# Altium PCB Controller.PcbDoc
Units mm, origin at the board's own origin, x right, y up, seen from the top; angles counter-clockwise.
Board outline 43 x 32 mm, 4 copper layers (Top Layer, GND, POWER, Bottom Layer), stack 0.603 mm thick; 51 components, 47 nets, 257 pads, 153 vias.
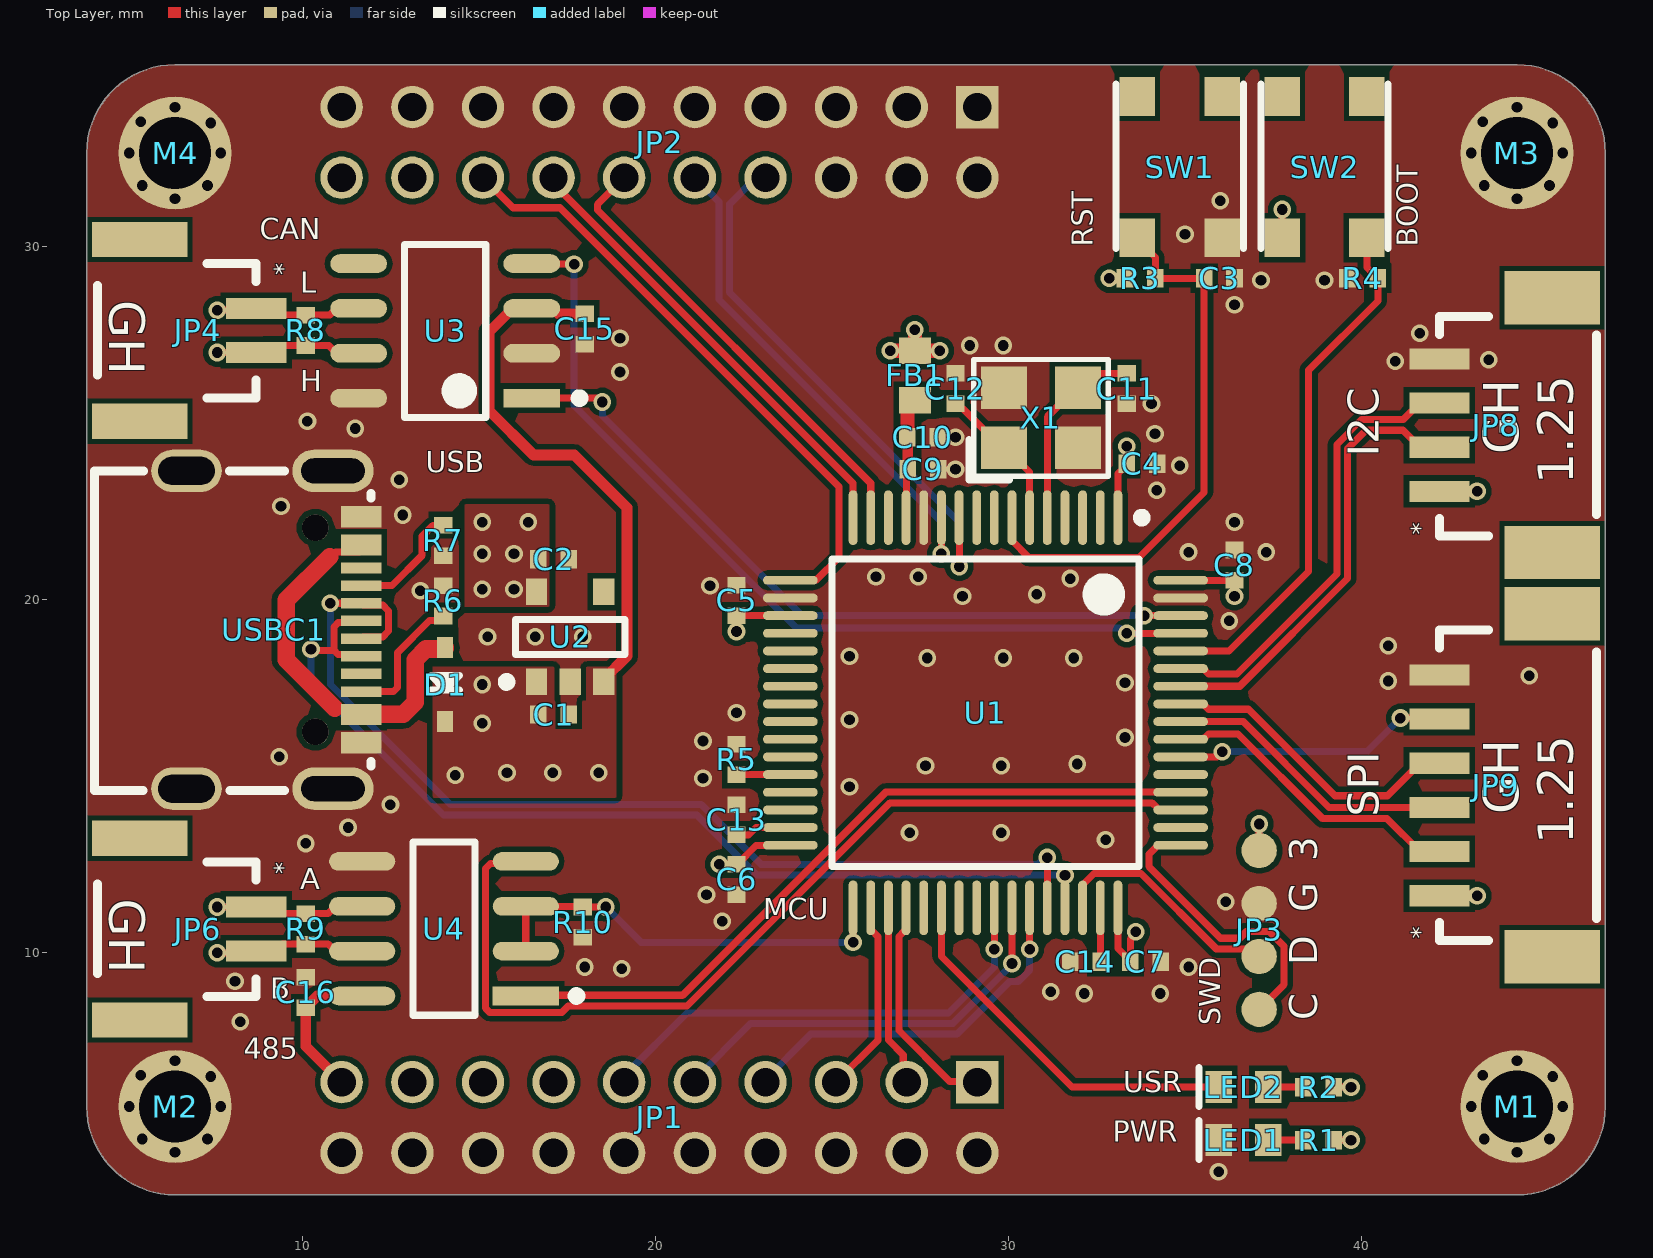
[diagram p0: Top Layer view]
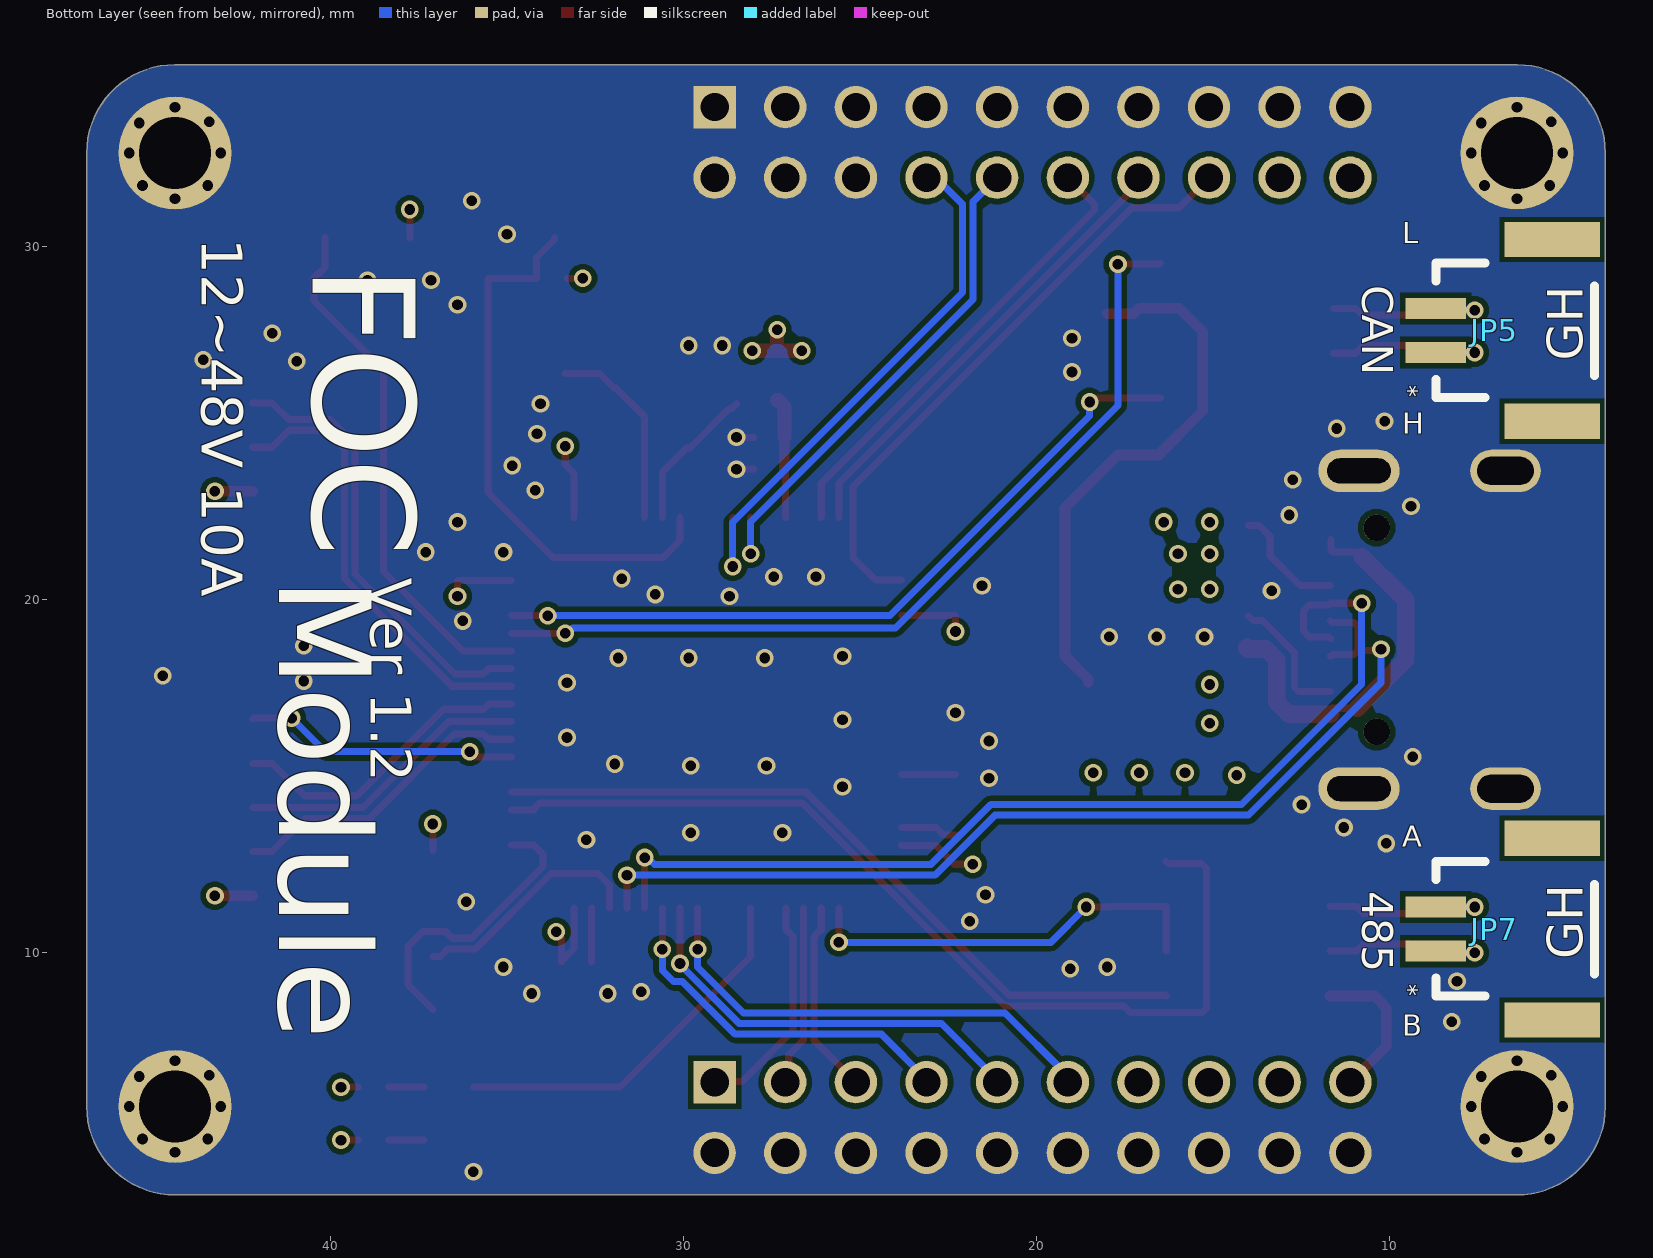
[diagram p1: Bottom Layer view, seen from below]
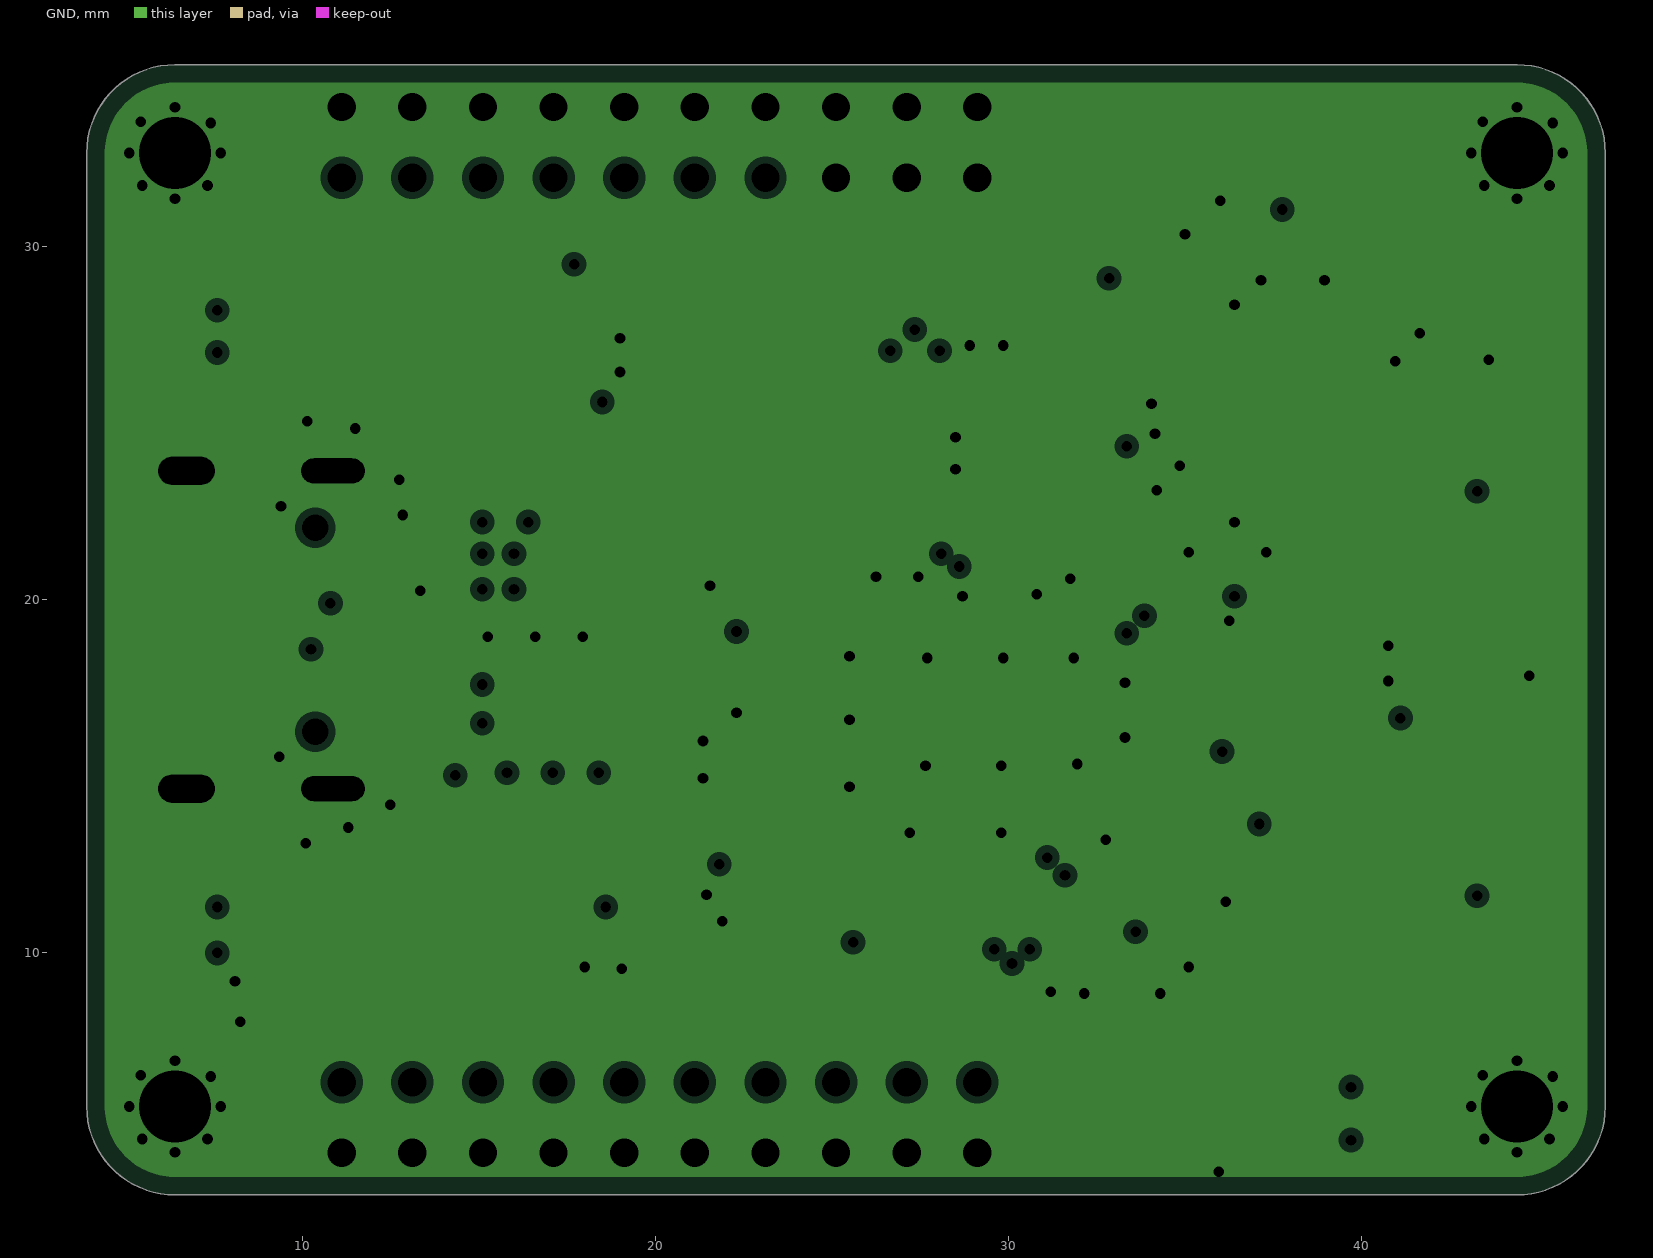
[diagram p2: GND, clearances drawn from the general rule]
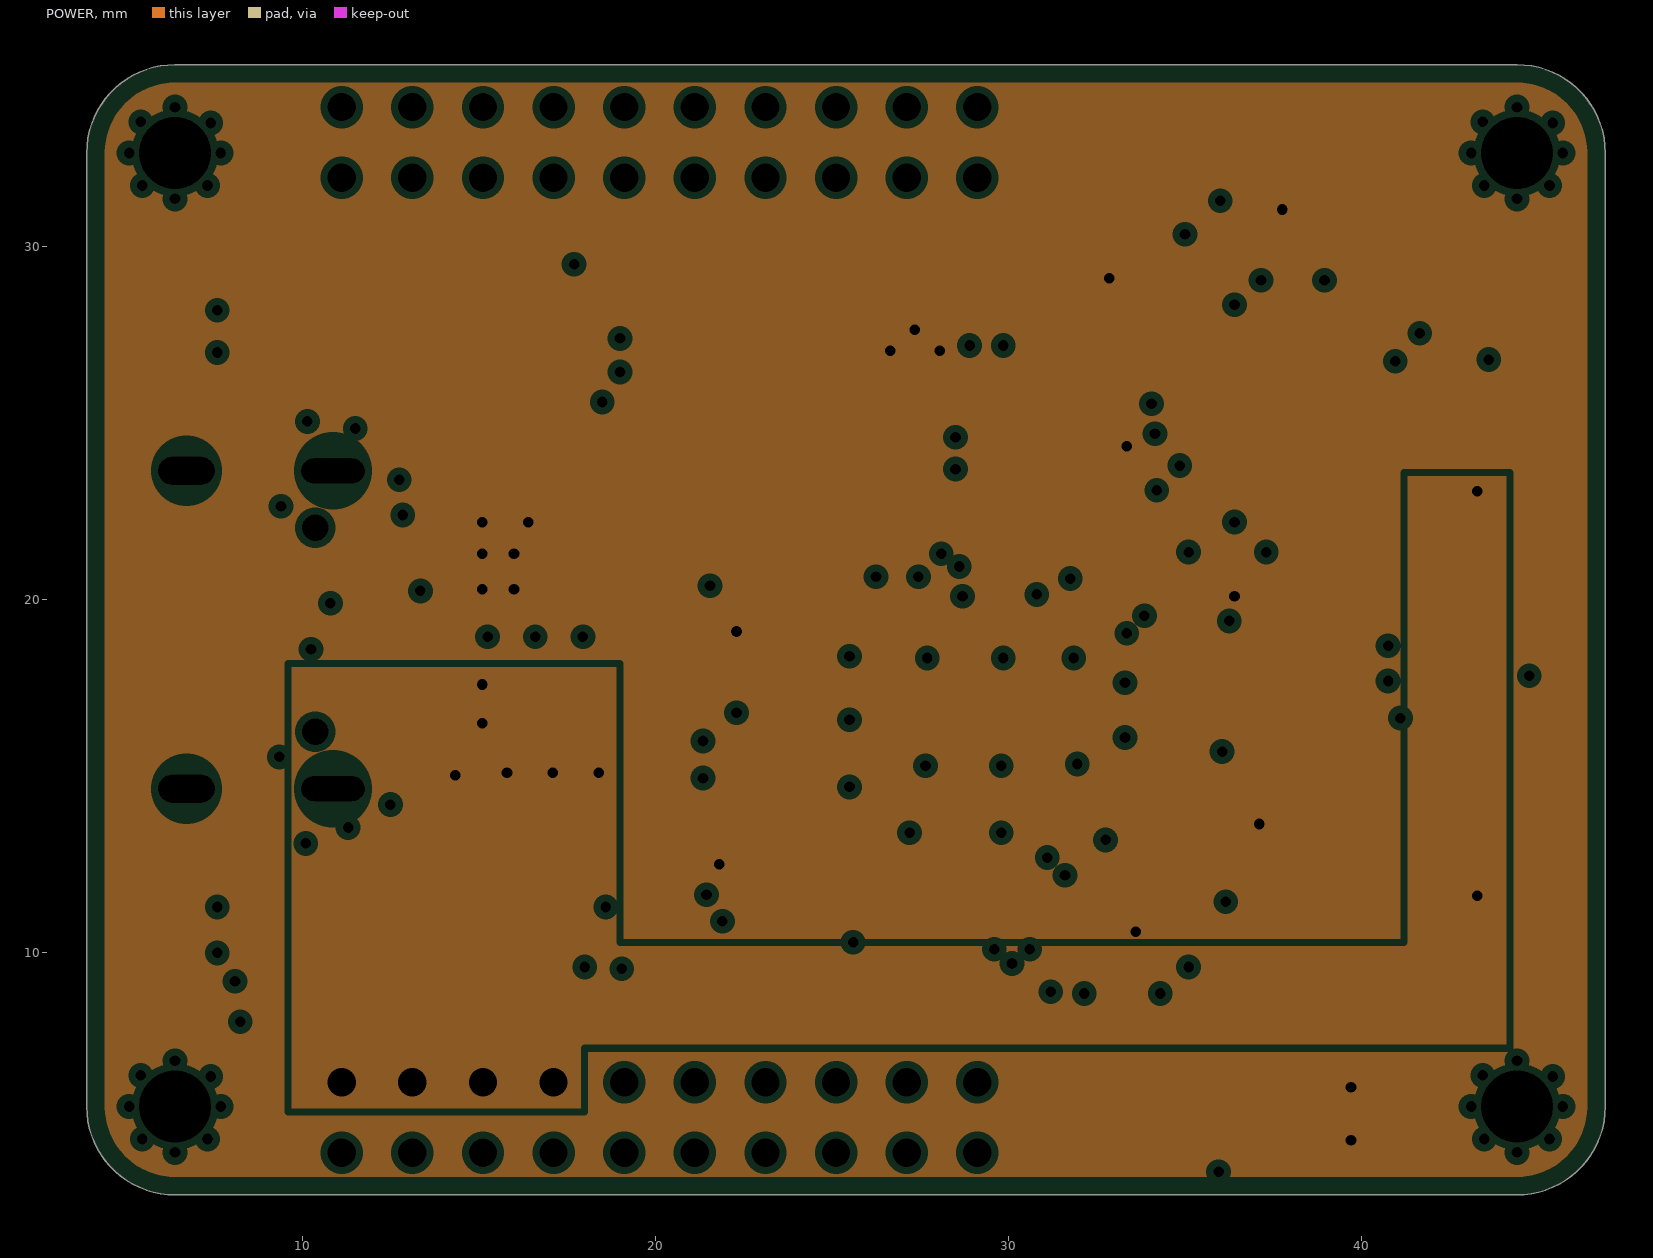
[diagram p3: POWER, clearances drawn from the general rule]
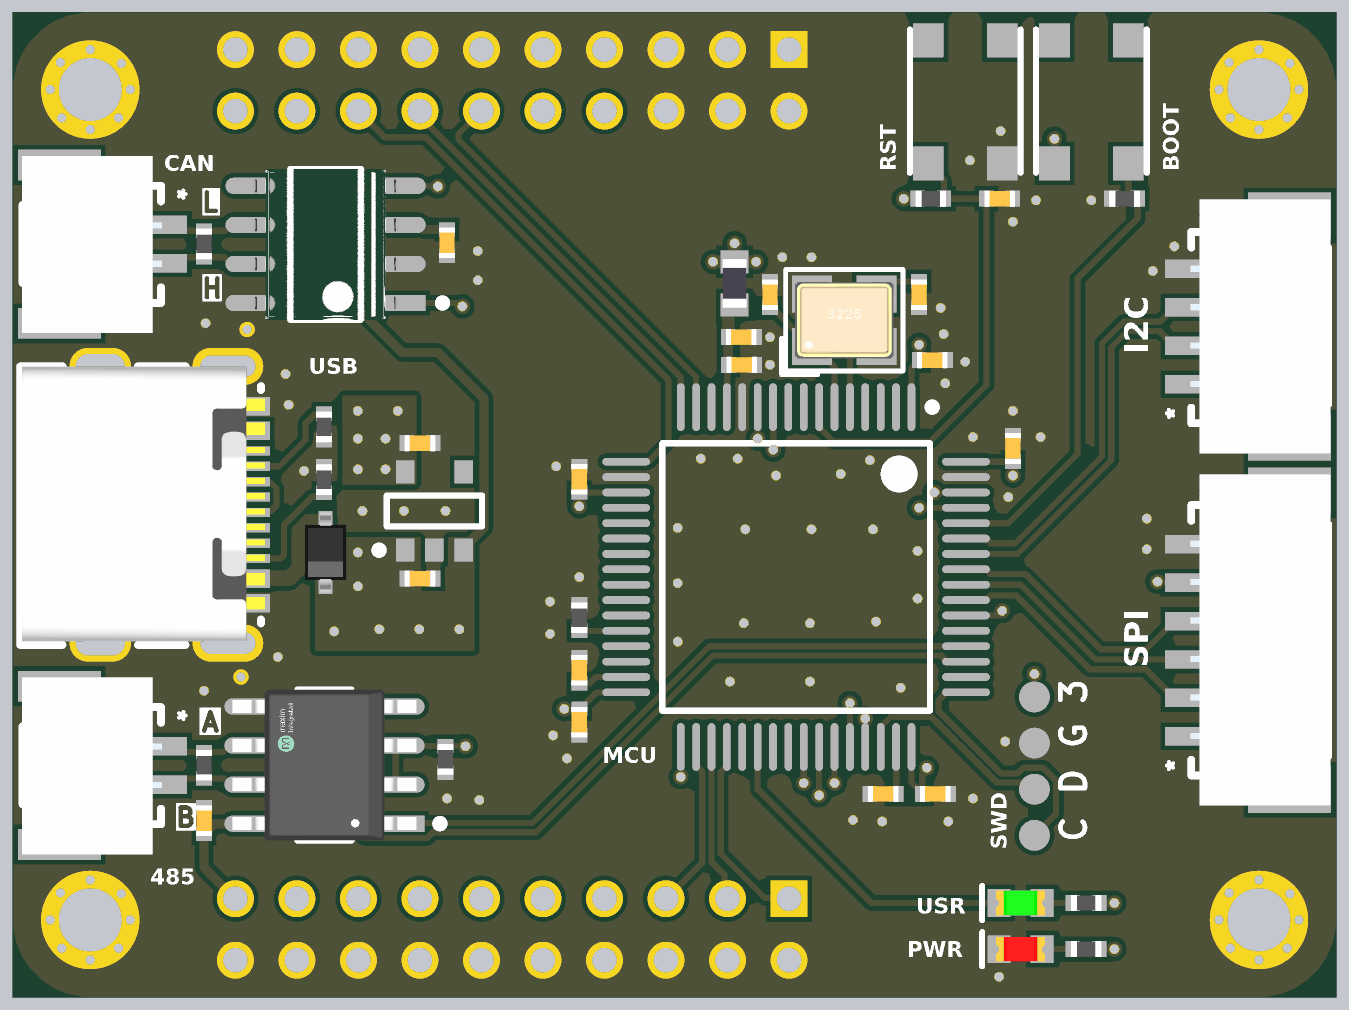
[diagram p4: 3D render of the assembled board from above, using the file's embedded part models]

## Layer stack, top to bottom
Top Solder: solder mask 0.0102, Solder Resist, Dk 3.5
Top Layer: signal copper 0.0356
Dielectric 2: prepreg 0.0711, PP-006, Dk 4.1
GND: plane copper 0.035, net PGND
Dielectric 1: dielectric 0.32, FR-4, Dk 4.8
POWER: plane copper 0.035, net 3V3
Dielectric 3: prepreg 0.0711, PP-006, Dk 4.1
Bottom Layer: signal copper 0.0356
Bottom Solder: solder mask 0.0102, Solder Resist, Dk 3.5

## Board outline
3.9,5.65 ccw(c6.4,5.65) 6.4,3.15 44.4,3.15 ccw(c44.4,5.65) 46.9,5.65 46.9,32.65 ccw(c44.4,32.65) 44.4,35.15 6.4,35.15 ccw(c6.4,32.65) 3.9,32.65 3.9,32.66

## Design rules (kind name [scope] priority, off if disabled: settings)
Clearance [All] p1: gap=0.1 ignorepadtopadclearanceinfootprint=FALSE except(0.15: Arc-Fill Arc-Poly Arc-Region Track-Fill Track-Poly Track-Region SMDPad-Fill SMDPad-Poly SMDPad-Region THPad-Fill THPad-Poly THPad-Region Via-Fill Via-Poly Via-Region Fill-Fill Fill-Poly Fill-Region Poly-Poly Poly-Region Region-Region)
DiffPairsRouting [All] p1: maxlimit=0.5 minlimit=0.1 mostfreqgap=0.254 toplayer_minwidth=0.1 toplayer_maxwidth=0.5 toplayer_prefwidth=0.254 bottomlayer_minwidth=0.1 bottomlayer_maxwidth=0.5 bottomlayer_prefwidth=0.254 maxuncoupledlength=12.7
HoleSize [All] p1: absolutevalues=TRUE maxlimit=6.3 minlimit=0.3 maxpercent=80.000 minpercent=20.000
HoleToHoleClearance [All] p1: gap=0.1 allowstackedmicrovias=TRUE
MinimumSolderMaskSliver [All] p1: minsoldermaskwidth=0.13
PlaneClearance [All] p1: clearance=0.2
PlaneConnect [All] p1: planeconnectstyle=Direct reliefexpansion=0.508 reliefentries=4 reliefconductorwidth=0.254 reliefairgap=0.254
PolygonConnect [All] p1: connectstyle=Direct reliefconductorwidth=0.254 reliefentries=4 polygonreliefangle="90 Angle" airgapwidth=0.254
RoutingVias [All] p1: holewidth=0.3 width=0.5 viastyle="Through Hole" minholewidth=0.2 minwidth=0.4 maxholewidth=5 maxwidth=10
SilkToSilkClearance [All] p1: silktosilkclearance=0
SilkToSolderMaskClearance [IsPad] p1: minsilkscreentomaskgap=0 clearancetoexposedcopper=TRUE
SolderMaskExpansion [All] p1: expansion=0 istentingtop=FALSE
UnRoutedNet [All] p1: checkbadconnections=TRUE
Width [All] p1: maxlimit=10 minlimit=0.1 preferedwidth=0.2
21 further rules are at their usual default settings.

## Components (designator, comment, footprint, x,y, rotation, side; value= is the part's Value field where it differs from the comment)
C1 "1uF" Capacitor_0402_SMD 17.55,16.75 r180 top
C2 "1uF" Capacitor_0402_SMD 17.55,21.15 r180 top
C3 "100nF" Capacitor_0402_SMD 35.54,29.1 r0 top
C4 "100nF" Capacitor_0402_SMD 34.21,23.85 r180 top
C5 "100nF" Capacitor_0402_SMD 22.3,20.41 r270 top
C6 "100nF" Capacitor_0402_SMD 22.3,11.65 r90 top
C7 "100nF" Capacitor_0402_SMD 34.31,9.75 r180 top
C8 "100nF" Capacitor_0402_SMD 36.4,21.41 r270 top
C9 "1uF" Capacitor_0402_SMD 28.01,23.7 r180 top
C10 "100nF" Capacitor_0402_SMD 28,24.6 r180 top
C11 "22pF" Capacitor_0402_SMD 33.35,25.55 r90 top
C12 "22pF" Capacitor_0402_SMD 28.5,26.41 r270 top
C13 "2.2uF" Capacitor_0402_SMD 22.3,14.2 r270 top
C14 "2.2uF" Capacitor_0402_SMD 31.75,9.75 r0 top
C15 "100nF" Capacitor_0402_SMD 18,28.1 r270 top
C16 "100nF" Capacitor_0402_SMD 10.1,8.45 r90 top
D1 "B5819WS" SOD323 14.05,18.65 r270 top
FB1 "FerriteBead" FerriteBead_0603_SMD 27.35,27.05 r270 top value=220R@100MHz
JP1 "Header 2X10" HDR2.0-LI-2x10P 29.12,6.34 r180 top
JP2 "Header 2X10" HDR2.0-LI-2x10P 29.12,33.95 r180 top
JP3 "SWD interface" SWD_INTERFACE 37.1,8.4 r90 top
JP4 "GH1.25-2Pin" A1257WR-S-XP-2PIN 8.7,28.25 r270 top
JP5 "GH1.25-2Pin" A1257WR-S-XP-2PIN 8.7,27 r90 bottom
JP6 "GH1.25-2Pin" A1257WR-S-XP-2PIN 8.7,11.3 r270 top
JP7 "GH1.25-2Pin" A1257WR-S-XP-2PIN 8.7,10.05 r90 bottom
JP8 "GH1.25-4Pin" A1257WR-S-XP-4Pin 42.2,23.069 r90 top
JP9 "GH1.25-6Pin" A1257WR-S-XP-6Pin 42.2,11.619 r90 top
LED1 "红色" LED_0603_SMD_RED 37.35,4.7 r180 top
LED2 "绿色" LED_0603_SMD_GREEN 37.35,6.2 r180 top
M1 "M2 Hole" "M2 HOLE" 44.4,5.65 r0 top
M2 "M2 Hole" "M2 HOLE" 6.4,5.65 r0 top
M3 "M2 Hole" "M2 HOLE" 44.4,32.65 r0 top
M4 "M2 Hole" "M2 HOLE" 6.4,32.65 r0 top
R1 "1K" Resistor_0402_SMD 38.35,4.7 r0 top
R2 "1K" Resistor_0402_SMD 38.35,6.2 r0 top
R3 "10K" Resistor_0402_SMD 33.3,29.1 r0 top
R4 "10K" Resistor_0402_SMD 40.46,29.1 r180 top
R5 "10K" Resistor_0402_SMD 22.3,15.05 r90 top
R6 "5.1K" Resistor_0402_SMD 14,20.4 r270 top
R7 "5.1K" Resistor_0402_SMD 14,22.11 r270 top
R8 "120R" Resistor_0402_SMD 10.1,27.2 r90 top
R9 "120R" Resistor_0402_SMD 10.1,11.11 r270 top
R10 "10K" Resistor_0402_SMD 17.95,11.3 r270 top
SW1 "SW4_3x4x2.5" SW4_3x4x2.5 36.05,34.25 r270 top
SW2 "SW4_3x4x2.5" SW4_3x4x2.5 40.15,34.25 r270 top
U1 "STM32F405RGT6" STM-LQFP64_L 29.35,16.8 r270 top
U2 "ME6211CXX" ME6211CXX 17.589,18.947 r90 top
U3 "TJA1050T/CM,118" FP-SOT96-1-IPC_C 14.051,27.615 r180 top
U4 "MAX485ESA+T" FP-S8-2-IPC_C 14.016,10.685 r180 top
USBC1 "TYPE-C 2.0 -16P" USB-C-SMD_16P 9.2,19.15 r90 top
X1 "8MHz" "OSC 3225-4P" 30.92,25.15 r0 top

## Footprints (in the part's own frame and the unit in brackets; to place one, negate y for a bottom-side part, rotate by r counter-clockwise, add the part's x,y. Pads: shape width x height; smd on the part's side, far side on the other; paste and mask are expansions set on the pad)
A1257WR-S-XP-2PIN [mm]
  rect 0.6x1.7 smd paste+0 mask+0: 1(0,0) 2(1.25,0)
  rect 1x2.7 smd paste+0 mask+0: 3(-1.95,-3.3) 3(3.2,-3.3)
  silkscreen extent -1.27,-4.5 2.54,0, body extent -2.24,-4.52 3.52,0.03, height 4.13
A1257WR-S-XP-4Pin [mm]
  rect 1.508x2.7 smd paste+0 mask+0: 0(-1.731,-3.2) 0(5.481,-3.2)
  rect 0.6x1.7 smd paste+0 mask+0: 1(0,0) 2(1.25,0) 3(2.5,0) 4(3.75,0)
  silkscreen extent -1.27,-4.45 4.95,0, body extent -2.25,-4.52 6.01,0.03, height 4.13
A1257WR-S-XP-6Pin [mm]
  rect 1.508x2.7 smd paste+0 mask+0: 0(-1.731,-3.2) 0(7.981,-3.2)
  rect 0.6x1.7 smd paste+0 mask+0: 1(0,0) 2(1.25,0) 3(2.5,0) 4(3.75,0) 5(5,0) 6(6.25,0)
  silkscreen extent -1.27,-4.45 7.52,0, body extent -2.24,-4.52 8.52,0.03, height 4.13
Capacitor_0402_SMD [mm]
  rect 0.47x0.52 smd: 1(0,0) 2(0.86,0)
  body extent -0.17,-0.26 1.02,0.26, height 0.51
FerriteBead_0603_SMD [mm]
  rect 0.75x0.9 smd: 1(0,0) 2(1.4,0)
  body extent -0.1,-0.4 1.5,0.4, height 0.8
FP-S8-2-IPC_C [mm]
  rect 1.874x0.527 smd paste+0 mask+0: 1(-2.316,1.905)
  rrect100% 1.874x0.527 smd paste+0 mask+0: 2(-2.316,0.635) 3(-2.316,-0.635) 4(-2.316,-1.905) 5(2.316,-1.905) 6(2.316,-0.635) 7(2.316,0.635) 8(2.316,1.905)
  silkscreen extent -3.88,-2.45 0.88,2.45, body extent -3.35,-2.55 3.35,2.55, height 0.25
FP-SOT96-1-IPC_C [mm]
  rect 1.604x0.528 smd paste+0 mask+0: 1(-2.451,1.905)
  rrect100% 1.604x0.528 smd paste+0 mask+0: 2(-2.451,0.635) 3(-2.451,-0.635) 4(-2.451,-1.905) 5(2.451,-1.905) 6(2.451,-0.635) 7(2.451,0.635) 8(2.451,1.905)
  silkscreen extent -3.93,-2.45 1.15,2.45, body extent -3.35,-2.55 3.35,2.55, height 0.25
HDR2.0-LI-2x10P [mm]
  rect 1.2x1.2 hole 0.8: 1(0,0)
  round 1.2 hole 0.8: 2(0,2) 3(2,0) 4(2,2) 5(4,0) 6(4,2) 7(6,0) 8(6,2) 9(8,0) 10(8,2) 11(10,0) 12(10,2) 13(12,0) 14(12,2) 15(14,0) 16(14,2) 17(16,0) 18(16,2) 19(18,0) 20(18,2)
  body extent -1,-1 19,3, height 6
LED_0603_SMD_GREEN [mm]
  rect 0.75x0.9 smd: 1(0,0) 2(1.4,0)
  silkscreen extent 1.95,-0.55 1.95,0.55, body extent -0.1,-0.4 1.5,0.4, height 0.8
LED_0603_SMD_RED [mm]
  rect 0.75x0.9 smd: 1(0,0) 2(1.4,0)
  silkscreen extent 1.95,-0.55 1.95,0.55, body extent -0.1,-0.4 1.5,0.4, height 0.8
"M2 HOLE" [mm]
  round 3.2 hole 2.05: 1(0,0)
ME6211CXX [mm] "SOT23, 5-Leads, Body 2.90x2.80mm, Pitch 0.95mm, IPC High Density"
  rect 0.75x0.6 smd: 1(-1.275,0.95) 2(-1.275,0) 3(-1.275,-0.95) 4(1.275,-0.95) 5(1.275,0.95)
  silkscreen extent -1.4,-1.55 0.5,1.92, body extent -0.9,-1.55 0.9,1.55, height 1.3
"OSC 3225-4P" [mm] "3.2*2.5*0.7mm(长宽高)"
  rect 1.3x1.2 smd: 1(-1.05,-0.85) 2(1.05,-0.85) 3(1.05,0.85) 4(-1.05,0.85)
  silkscreen extent -2.03,-1.75 1.91,1.65, body extent -1.6,-1.25 1.6,1.25, height 0.7
Resistor_0402_SMD [mm]
  rect 0.47x0.52 smd: 1(0,0) 2(0.86,0)
  body extent -0.07,-0.26 0.93,0.26, height 0.36
SOD323 [mm]
  rect 0.59x0.45 smd: 1(0,0) 2(2.1,0)
  silkscreen extent 0.8,-0.4 1.2,0.4, body extent -0.25,-0.67 2.35,0.67, height 1.1
STM-LQFP64_L [mm] "Thin QFP, 64-Leads, Body 10x10mm, Pitch 0.5mm, IPC High Density"
  oval 1.55x0.25 smd: 1(-5.525,3.75) 2(-5.525,3.25) 3(-5.525,2.75) 4(-5.525,2.25) 5(-5.525,1.75) 6(-5.525,1.25) 7(-5.525,0.75) 8(-5.525,0.25) 9(-5.525,-0.25) 10(-5.525,-0.75) 11(-5.525,-1.25) 12(-5.525,-1.75) 13(-5.525,-2.25) 14(-5.525,-2.75) 15(-5.525,-3.25) 16(-5.525,-3.75) 33(5.525,-3.75) 34(5.525,-3.25) 35(5.525,-2.75) 36(5.525,-2.25) 37(5.525,-1.75) 38(5.525,-1.25) 39(5.525,-0.75) 40(5.525,-0.25) 41(5.525,0.25) 42(5.525,0.75) 43(5.525,1.25) 44(5.525,1.75) 45(5.525,2.25) 46(5.525,2.75) 47(5.525,3.25) 48(5.525,3.75)
  oval 0.25x1.55 smd: 17(-3.75,-5.525) 18(-3.25,-5.525) 19(-2.75,-5.525) 20(-2.25,-5.525) 21(-1.75,-5.525) 22(-1.25,-5.525) 23(-0.75,-5.525) 24(-0.25,-5.525) 25(0.25,-5.525) 26(0.75,-5.525) 27(1.25,-5.525) 28(1.75,-5.525) 29(2.25,-5.525) 30(2.75,-5.525) 31(3.25,-5.525) 32(3.75,-5.525) 49(3.75,5.525) 50(3.25,5.525) 51(2.75,5.525) 52(2.25,5.525) 53(1.75,5.525) 54(1.25,5.525) 55(0.75,5.525) 56(0.25,5.525) 57(-0.25,5.525) 58(-0.75,5.525) 59(-1.25,5.525) 60(-1.75,5.525) 61(-2.25,5.525) 62(-2.75,5.525) 63(-3.25,5.525) 64(-3.75,5.525)
  silkscreen extent -5.65,-4.35 4.35,4.55, body extent -5,-5 5,5, height 1.6
SW4_3x4x2.5 [mm]
  rect 1.1x1 smd: 1(0,0) 2(4,0) 3(0,-2.4) 4(4,-2.4)
  silkscreen extent -0.35,-3 4.3,0.6, body extent -0.36,-2.9 4.36,0.5, height 2.5
SWD_INTERFACE [mm]
  round 1 smd: 1(0,0) 2(1.5,0) 3(3,0) 4(4.5,0)
USB-C-SMD_16P [mm] "封装库来自淘宝ID:黄晶宝石"
  oval 1.2x2.3 hole 0.7 slot 1.8 at 90 deg: 0(-4.5,-1.675) 0(4.5,-1.675)
  oval 1.2x2 hole 0.8 slot 1.6 at 90 deg: 0(-4.5,2.475) 0(4.5,2.475)
  rect 0.3x1.15 smd: A1(3.35,-2.473) A4(2.55,-2.471) A5(1.25,-2.475) A6(0.25,-2.475) A7(-0.25,-2.473) A9(-2.55,-2.475) A12(-3.35,-2.475) B1(-3.05,-2.475) B4(-2.25,-2.475) B5(-1.75,-2.475) B6(-0.75,-2.475) B7(0.75,-2.473) B9(2.25,-2.471) B12(3.05,-2.473)
  rect 0.3x1.148 smd: A8(1.75,-2.475) B8(-1.25,-2.475)
  round 0.75 hole 0.75 unplated: ""(-2.89,-1.175) ""(2.89,-1.175)
  silkscreen extent -4.56,-2.75 4.5,5.08, body extent -4.44,-2.87 4.5,5.03, height 3.25

## Part data
C1 C2 C3 C4 C5 C6 C7 C8 C9 C10 C11 C12 C13 C14 C15 C16: library part C, "无极性贴片电容", BOM名称=无极性贴片电容, 学习资源=www.ooocke.com, 版权归属=源创客
D1: library part 1N5819, "肖特基二极管", BOM名称=肖特基二极管, 学习资源=www.ooocke.com, 属性=40V/2A, 版权归属=源创客
JP1 JP2: library part "Header 10X2", "10*2P接插件", BOM名称=10*2P接插件, 封装库来自淘宝卖家 ID：黄晶宝石=其他店铺购入均为盗版假冒封装库, 联系卖家，免费查找封装=唯一出售店铺网址https://shop463601444.taobao.com
JP3: library part SWD_interface
JP4 JP5 JP6 JP7 JP8 JP9: "CJTconn A1257 Series 1.25mm pitch wire to board connector"
LED1 LED2: library part LED-SMD, "贴片LED", BOM名称=贴片LED, 学习资源=www.ooocke.com, 版权归属=源创客
M1 M2 M3 M4: library part M2_hole
R1 R2 R3 R4 R5 R6 R7 R8 R9 R10: library part R, "贴片电阻", BOM名称=贴片电阻, 学习资源=www.ooocke.com, 版权归属=源创客
U1: library part CMP-0243-00019-3, "ARM Cortex-M4 32-bit MCU+FPU, 210 DMIPS, 1024 kB Flash, 192 kB Internal RAM, 51 I/Os, 64-pin LQFP, -40 to 85 degC, Tray", I/Os (High Current)=51, Manufacturer=STMicroelectronics, Operating Frequency(F) (Processor speed) (MHz)=168, Supply Voltage(Vcc) max (V)=3.6, Supply Voltage(Vcc) min (V)=1.8, ComponentLink1Description="Manufacturer URL", ComponentLink1URL=http://www.st.com/web/en/home.html, ComponentLink2Description=Datasheet, ComponentLink2URL=http://www.st.com/st-web-ui/static/active/en/resource/technical/document/datasheet/DM00037051.pdf, ComponentLink3Description="Package Specification", ComponentLink3URL=http://www.st.com/st-web-ui/static/active/en/resource/technical/document/datasheet/DM00037051.pdf, Core="ARM Cortex-M4", D/A Converter=2x12-bit, DatasheetVersion="Rev. 4", FLASH Size (Prog) (kB)=1024, Internal RAM Size (kB)=192, Mounting Technology="Surface Mount", PackageDescription="64-Pin Low Profile Quad Flat Package, 10 x 10 mm Body, 0.5 mm Pitch", PackageReference=LQFP64, PackageVersion="Rev. 4, 06/2013", Packing=Tray, PartNumber=STM32F405RGT6
U2: "高精度、高纹波抑制比、低噪声、超快响应 LDO"
U3: library part CMP-2000-04923-2, "IC TRANSCEIVER HALF 1/1 8SO", Case/Package=SO, Max Operating Temperature=150°C, Max Supply Current=10mA, Max Supply Voltage=5.25V, Min Operating Temperature=-40°C, Min Supply Voltage=4.75V, Package Quantity=2500, Contact Plating=Gold, Data Rate=1Mbps, Interface=CAN, Lead Free="Lead Free", Mount="Surface Mount", Nominal Supply Current=10mA, Number of Pins=8, Number of Receive Buffers=1, Number of Transceivers=1, Number of Transmit Buffers=1, Packaging="Tape and Reel", Radiation Hardening=No, REACH SVHC="No SVHC", Receiver Hysteresis=70mV, Simplex/Duplex="Half Duplex"
U4: library part CMP-05679-000009-1, "IC TRANSCEIVER HALF 1/1 8SOIC", Manufacturer="Maxim Integrated", Max Supply Voltage=5.25V, Min Supply Voltage=4.75V, Nominal Supply Current=0.5mA, Package=S8-2, Temperature="-40°C to +85°C", Temperature Range High=+85°C, Temperature Range Low=-40°C, Automotive=No, Category=IC, ComponentLink2Description=Datasheet, ComponentLink2URL=https://datasheets.maximintegrated.com/en/ds/MAX1487-MAX491.pdf, Data Rate=2.5Mbits/s, Device Class L1="Integrated Circuits (ICs)", Device Class L2="Interface ICs", Device Class L3="RS-232 / RS-422 / RS-485 Interface ICs", Digikey Description="IC TRANSCEIVER HALF 1/1 8SOIC", Footprint Url=https://pdfserv.maximintegrated.com/land_patterns/90-0096.PDF, Height=1.75mm, Interface=RS-485,RS-422, Ipc Land Pattern Name=SOIC127P600X155-8, Lead Free=Yes, Manufacturer Part Number=MAX485ESA+T, Mouser Description="RS-422/RS-485 Interface IC RS-485/RS-422 Transceiver", Number Of Receivers=1, Number Of Transmitters=1, Octopart=https://octopart.com/max485esa%2Bt-maxim+integrated-40011239, RoHS=TRUE, Simplex Duplex=Half-Duplex, Standoff Height=0.1mm
USBC1: library part USB2.0_Type-C_16Pin, "USB2.0_Type-C_16Pin母座", 联系卖家 免费技术支持=封装库来自淘宝卖家ID：黄晶宝石, 联系卖家 免费查找封装=唯一出售店铺网址https://shop463601444.taobao.com
X1: library part XTAL-4P, "4脚无源晶振", BOM名称=4脚无源晶振, 学习资源=www.ooocke.com, 版权归属=源创客

## Via types
v1: diameter 0.5, hole 0.3, Top Layer to Bottom Layer, tented both sides, 119 vias
v2: diameter 0.3, hole 0.3, Top Layer to Bottom Layer, 32 vias
v3: diameter 0.5, hole 0.3, Top Layer to Bottom Layer, 2 vias

## Nets (pads, with @x,y where several pads share a name; then routed paths per layer and width w, separated by ;. In a path a pad name is that pad's centre, name@x,y a point inside that pad or via, vN(x,y) a via of type N, cw(c..) or ccw(c..) an arc to the next point about the centre after c; other vN are vias at no path point)
3V3: C2.2 C4.2 C5.2 C6.2 C7.2 C8.2 FB1.1 JP3.4 R1.2 R2.2 R3.1 SW2.4 U1.1 U1.19 U1.32 U1.48 U1.64 U2.5 | length 15.9
  Top Layer w0.2: v1(21.81,12.51) C6.2 22.325,12.51 22.855,13.04 23.815,13.04 U1.32 ; v1(22.3,19.1) C5.2 U1.19 ; v1(32.85,29.1) R3.1 ; U1.48 33.1,10.125 C7.2@33.45,9.775 ; U1.1 33.1,23.575 33.35,23.825 C4.2 v1(33.35,24.35) ; C7.2 C7.2@33.45,9.775 ; v1(33.6,10.6) 33.6,10.546 33.45,10.396 C7.2@33.45,9.775 ; U1.64 C8.2 v1(36.4,20.1) ; JP3.4 v1(37.1,13.65) ; SW2.4 v1(37.75,31.05) ; R1.2 v1(39.7,4.7) ; R2.2 v1(39.7,6.2)
  Top Layer w0.4: v1(26.65,27.05) FB1.1 ; v1(27.35,27.65) FB1.1 ; v1(28.05,27.05) FB1.1
  other v1: 15.1,20.3 16,20.3 15.1,21.3 16,21.3 15.1,22.2 16.4,22.2
3V3A: C9.2 C10.2 FB1.2 U1.13 | length 3.5
  Top Layer w0.2: U1.13 27.11,22.335 27.11,23.66 C9.2
  Top Layer w0.3: C10.2 27.145,24.595 27.145,23.705 C9.2
  Top Layer w0.4: C10.2 27.14,25.475 27.315,25.65 FB1.2
5V: C1.2 C15.1 C16.1 D1.2 JP1.13 JP1.15 JP1.17 JP1.19 JP8.1 JP9.1 U2.1 U2.3 U3.3 U4.8 | length 21.9
  Top Layer w0.3: JP1.19 10.1,7.36 C16.1 10.125,8.45 10.21,8.535 10.21,8.56 10.43,8.78 U4.8 ; C15.1 17.252,28.1 17.102,28.25 U3.3 15.964,28.25 15.3,27.586 15.3,25.35 16.55,24.1 17.7,24.1 19.2,22.6 19.2,18.408 18.539,17.747 U2.3 ; JP9.1 v1(43.269,11.619) ; JP8.1 v1(43.269,23.069)
  other v1: 14.332,15.032 15.8,15.1 17.1,15.1 18.4,15.1 15.1,16.5 15.1,17.6
ADC_IA: JP2.12 U1.15 | length 13.1
  Top Layer w0.2: JP2.12 18.368,31.198 18.368,31.032 26.1,23.3 U1.15
ADC_IB: JP2.14 U1.16 | length 13.1
  Top Layer w0.2: JP2.14 17.12,31.78 25.6,23.3 U1.16
ADC_IC: JP2.16 U1.17 | length 17.3
  Top Layer w0.2: JP2.16 15.97,31.1 17.3,31.1 25.2,23.2 25.2,21.2 24.56,20.56 23.835,20.56 U1.17
ADC_TEMP: JP2.8 U1.10 | length 15.7
  Top Layer w0.2: U1.10 28.61,22.315 v1(28.61,20.94)
  Bottom Layer w0.2: JP2.8 22.85,31.95 22.1,31.2 22.1,28.7 28.61,22.19 v1(28.61,20.94)
ADC_VIN: JP2.10 U1.11 | length 14.6
  Top Layer w0.2: v1(28.1,21.3) U1.11
  Bottom Layer w0.2: JP2.10 21.8,31.27 21.8,28.5 28.1,22.2 v1(28.1,21.3)
BOOT0: R4.1 SW2.2 U1.60 | length 15
  Top Layer w0.2: U1.60 36.25,18.55 38.5,20.8 38.5,26.5 40.46,28.46 R4.1 40.46,29.125 40.325,29.26 40.3,29.26 40.15,29.41 SW2.2
BOOT1: R5.1 U1.28 | length 1.5
  Top Layer w0.2: R5.1 U1.28
CAN_RX: U1.61 U3.4 | length 25.1
  Top Layer w0.2: U3.4 16.512,29.51 17.69,29.51 v1(17.7,29.5) ; v1(33.35,19.05) U1.61
  Bottom Layer w0.2: v1(17.7,29.5) 17.7,25.5 24,19.2 33.146,19.2 33.296,19.05 v1(33.35,19.05)
CAN_TX: U1.62 U3.1 | length 21.2
  Top Layer w0.2: U3.1 18.336,25.71 18.446,25.6 v1(18.5,25.6) ; v1(33.85,19.55) U1.62
  Bottom Layer w0.2: v1(18.5,25.6) 18.5,25.2 24.15,19.55 v1(33.85,19.55)
I2C_SCL: JP8.2 U1.58 | length 12.7
  Top Layer w0.2: U1.58 36.55,17.55 39.6,20.6 39.6,24.276 40.124,24.8 41.169,24.8 41.65,24.319 JP8.2
I2C_SDA: JP8.3 U1.59 | length 12.7
  Top Layer w0.2: U1.59 35.517,18.05 35.667,17.9 36.476,17.9 39.3,20.724 39.3,24.4 40,25.1 41.181,25.1 41.65,25.569 JP8.3
LED: LED2.2 U1.38 | length 10.8
  Top Layer w0.2: U1.38 28.1,9.9 31.8,6.2 LED2.2
NetC11_2: C11.2 U1.5 X1.3 | length 5.6
  Top Layer w0.2: U1.5 31.1,25.18 31.92,26 X1.3 32.38,26.41 C11.2
NetC12_2: C12.2 U1.6 X1.1 | length 4.2
  Top Layer w0.2: C12.2 28.635,25.415 28.705,25.415 29.82,24.3 X1.1 29.92,24.3 30.6,23.62 U1.6
NetC13_2: C13.2 U1.31 | length 1.6
  Top Layer w0.2: C13.2 22.64,13.34 22.85,13.55 U1.31
NetC14_2: C14.2 U1.47 | length 1.5
  Top Layer w0.2: U1.47 32.605,11.27 32.605,9.755 C14.2
NetJP4_1: JP4.1 JP5.2 R8.2 U3.6 | length 5.3
  Top Layer w0.2: v1(7.6,28.2) 8.65,28.2 JP4.1 8.89,28.06 R8.2 10.783,28.06 10.973,28.25 U3.6
  Bottom Layer w0.2: v1(7.6,28.2) 8.65,28.2 JP5.2
NetJP4_2: JP4.2 JP5.1 R8.1 U3.7 | length 5.3
  Top Layer w0.2: v1(7.6,27) JP4.2 8.9,27.2 R8.1 10.753,27.2 10.973,26.98 U3.7
  Bottom Layer w0.2: v1(7.6,27) JP5.1
NetJP6_1: JP6.1 JP7.2 R9.1 U4.6 | length 5.4
  Top Layer w0.2: v1(7.6,11.3) JP6.1 8.89,11.11 R9.1 10.728,11.11 10.938,11.32 U4.6
  Bottom Layer w0.2: v1(7.6,11.3) JP7.2
NetJP6_2: JP6.2 JP7.1 R9.2 U4.7 | length 5.4
  Top Layer w0.2: v1(7.6,10) 8.65,10 JP6.2 9.25,10.05 9.45,10.25 R9.2 10.738,10.25 10.938,10.05 U4.7
  Bottom Layer w0.2: v1(7.6,10) 8.65,10 JP7.1
NetLED1_1: LED1.1 R1.1 | length 1
  Top Layer w0.2: LED1.1 R1.1
NetLED2_1: LED2.1 R2.1 | length 1
  Top Layer w0.2: LED2.1 R2.1
NetR6_2: R6.2 USBC1.B5 | length 3.8
  Top Layer w0.2: USBC1.B5 12.583,17.4 12.7,17.517 12.7,18.5 13.61,19.41 13.87,19.41 R6.2
NetR7_1: R7.1 USBC1.A5 | length 3.3
  Top Layer w0.2: USBC1.A5 12.539,20.4 13.4,21.26 13.4,21.8 13.7,22.1 13.99,22.1 R7.1
NRST: C3.1 R3.2 SW1.4 U1.7 | length 15.9
  Top Layer w0.2: U1.7 30.1,21.675 30.575,21.2 33.7,21.2 35.54,23.04 C3.1 R3.2 34.16,29.69 33.65,30.2 SW1.4
PGND: C1.1 C2.1 C3.2 C4.1 C5.1 C6.1 C7.1 C8.1 C9.1 C10.1 C11.1 C12.1 C13.1 C14.1 C15.2 C16.2 JP1.2 JP1.4 JP1.6 JP1.8 JP1.10 JP1.12 JP1.14 JP1.16 JP1.18 JP1.20 JP2.1 JP2.2 JP2.3 JP2.4 JP2.5 JP2.6 JP2.7 JP2.9 JP2.11 JP2.13 JP2.15 JP2.17 JP2.19 JP3.3 JP8.4 JP9.6 LED1.2 M1.1 M2.1 M3.1 M4.1 R4.2 R5.2 R6.1 R7.2 R10.2 SW1.2 U1.12 U1.18 U1.63 U2.2 U3.2 U3.8 U4.5 USBC1.0 USBC1.A1 USBC1.A12 USBC1.B1 USBC1.B12 X1.2 X1.4 | length 1
  Top Layer w0.2: C10.1 v1(28.5,24.6) ; C9.1 v1(28.5,23.7)
  other v1: 35.95,3.8 8.25,8.05 32.15,8.85 34.3,8.85 31.2,8.9 8.1,9.2 19.05,9.55 18,9.6 35.1,9.6 21.9,10.9 36.15,11.45 21.45,11.65 10.1,13.1 32.75,13.2 27.2,13.4 29.8,13.4 12.5,14.2 25.5,14.7 21.35,14.95 27.65,15.3 29.8,15.3 31.95,15.35 9.35,15.55 21.35,16 33.3,16.1 25.5,16.6 22.3,16.8 33.3,17.65 40.75,17.7 44.75,17.85 27.7,18.35 29.85,18.35 31.85,18.35 25.5,18.4 40.75,18.7 15.25,18.95 16.6,18.95 17.95,18.95 36.25,19.4 28.7,20.1 30.8,20.15 13.35,20.25 21.55,20.4 31.75,20.6 26.25,20.65 27.45,20.65 35.1,21.35 37.3,21.35 36.4,22.2 12.85,22.4 9.4,22.65 34.2,23.1 12.75,23.4 34.85,23.8 34.15,24.7 10.15,25.05 34.05,25.55 19,26.45 40.95,26.75 43.6,26.8 28.9,27.2 29.85,27.2 19,27.4 41.65,27.55 36.4,28.35 37.15,29.05 38.95,29.05 35,30.35 36,31.3
  other v2: 6.4,4.35 44.4,4.35 5.47,4.73 7.32,4.73 43.47,4.73 45.32,4.73 5.1,5.65 7.7,5.65 43.1,5.65 45.7,5.65 7.41,6.5 45.41,6.5 5.43,6.53 43.43,6.53 6.4,6.95 44.4,6.95 6.4,31.35 44.4,31.35 5.47,31.73 7.32,31.73 43.47,31.73 45.32,31.73 5.1,32.65 7.7,32.65 43.1,32.65 45.7,32.65 7.41,33.5 45.41,33.5 5.43,33.53 43.43,33.53 6.4,33.95 44.4,33.95
  other v3: 11.3,13.55 11.5,24.85
PWM_AH: JP1.11 U1.41 | length 13.6
  Top Layer w0.2: v1(29.6,10.1) U1.41
  Bottom Layer w0.2: JP1.11 19.12,6.52 20.9,8.3 28.3,8.3 29.6,9.6 v1(29.6,10.1)
PWM_AL: JP1.5 U1.34 | length 5.5
  Top Layer w0.2: JP1.5 26.3,7.52 26.3,10.465 26.15,10.615 26.123,10.615 26.1,10.639 U1.34
PWM_BH: JP1.9 U1.42 | length 12
  Top Layer w0.2: v1(30.1,9.7) U1.42
  Bottom Layer w0.2: JP1.9 21.12,6.42 22.7,8 28.424,8 30.1,9.676 v1(30.1,9.7)
PWM_BL: JP1.3 U1.35 | length 5.2
  Top Layer w0.2: U1.35 26.6,7.533 27.02,7.113 27.02,6.44 JP1.3
PWM_CH: JP1.7 U1.43 | length 10.6
  Top Layer w0.2: v1(30.6,10.1) U1.43
  Bottom Layer w0.2: JP1.7 23.12,6.42 24.4,7.7 28.549,7.7 30.036,9.188 30.288,9.188 30.6,9.5 v1(30.6,10.1)
PWM_CL: JP1.1 U1.36 | length 6.4
  Top Layer w0.2: U1.36 27.1,10.639 27.077,10.615 27.05,10.615 26.9,10.465 26.9,7.8 28.337,6.363 29.097,6.363 JP1.1
RS485_EN: R10.1 U1.33 U4.2 U4.3 | length 11.9
  Top Layer w0.2: U4.2 U4.3 16.342,11.31 17.94,11.31 R10.1 v1(18.6,11.3) ; v1(25.6,10.3) U1.33
  Bottom Layer w0.2: v1(18.6,11.3) 19.6,10.3 v1(25.6,10.3)
SPI_CS: JP9.5 U1.54 | length 7.8
  Top Layer w0.2: U1.54 35.9,15.55 v1(36.05,15.7) ; v1(41.1,16.65) 42.169,16.65 JP9.5
  Bottom Layer w0.2: v1(36.05,15.7) 40.15,15.7 v1(41.1,16.65)
SPI_MISO: JP9.3 U1.56 | length 8.3
  Top Layer w0.2: U1.56 36.65,16.55 39.081,14.119 JP9.3
SPI_MOSI: JP9.4 U1.57 | length 8.8
  Top Layer w0.2: U1.57 35.517,17.05 35.667,16.9 36.8,16.9 39.25,14.45 40.731,14.45 41.65,15.369 JP9.4
SPI_SCK: JP9.2 U1.55 | length 8.8
  Top Layer w0.2: U1.55 35.517,16.05 35.667,16.2 36.5,16.2 38.9,13.8 40.719,13.8 41.65,12.869 JP9.2
SWCLK: JP3.1 U1.49 | length 8.3
  Top Layer w0.2: U1.49 34.239,13.05 33.983,12.794 33.983,12.441 36.009,10.416 36.55,10.416 36.734,10.6 37.39,10.6 37.8,10.19 37.8,9.1 JP3.1
SWDIO: JP3.2 U1.46 | length 6.8
  Top Layer w0.2: U1.46 32.1,11.925 32.425,12.25 33.75,12.25 35.884,10.116 36.668,10.116 36.884,9.9 JP3.2
UART4_RX: U1.52 U4.1 | length 20.9
  Top Layer w0.2: U4.1 16.352,8.8 20.776,8.8 26.526,14.55 U1.52
UART4_TX: U1.51 U4.4 | length 27.5
  Top Layer w0.2: U4.4 16.27,12.527 15.335,12.527 15.195,12.388 15.195,8.434 15.312,8.317 17.352,8.317 17.535,8.5 20.9,8.5 26.65,14.25 34.065,14.25 34.215,14.1 34.215,14.073 34.239,14.05 U1.51
USB_DN: U1.44 USBC1.A7 USBC1.B7 | length 29.4
  Top Layer w0.2: v1(10.8,19.9) USBC1.B7 11.723,19.85 12.283,19.85 12.45,19.683 12.45,19.117 12.283,18.95 11.723,18.95 USBC1.A7 ; U1.44 v1(31.1,12.7)
  Bottom Layer w0.2: v1(10.8,19.9) 10.8,17.6 14.2,14.2 21.3,14.2 23,12.5 30.819,12.5 31.019,12.7 v1(31.1,12.7)
USB_DP: U1.45 USBC1.A6 USBC1.B6 | length 28.5
  Top Layer w0.2: v1(10.25,18.6) 10.281,18.569 10.898,18.569 ; USBC1.B6 11.625,18.45 11.017,18.45 10.898,18.569 ; USBC1.A6 11.625,19.35 11.017,19.35 10.898,19.231 10.898,18.569 ; U1.45 v1(31.6,12.2)
  Bottom Layer w0.2: v1(10.25,18.6) 10.25,17.65 14,13.9 21.176,13.9 22.876,12.2 v1(31.6,12.2)
VBUS: D1.1 USBC1.A4 USBC1.A9 USBC1.B4 USBC1.B9 | length 11.3
  Top Layer w0.2: 10.778,21.222 10.822,21.222 10.95,21.35 11.621,21.35 USBC1.B9 USBC1.A4 ; 10.927,16.928 11.647,16.928 USBC1.B4
  Top Layer w0.5: 10.778,21.222 9.55,19.994 9.55,18.305 10.927,16.928 ; USBC1.B4@11.671,16.758 12.858,16.758 13.2,17.1 13.2,18.3 13.505,18.605 14.025,18.605 14.05,18.63 D1.1
pads on no net: JP2.18 JP2.20 JP4.3 JP5.3 JP6.3 JP7.3 JP8.0 JP9.0 SW1.1 SW1.3 SW2.1 SW2.3 U1.2 U1.3 U1.4 U1.8 U1.9 U1.14 U1.20 U1.21 U1.22 U1.23 U1.24 U1.25 U1.26 U1.27 U1.29 U1.30 U1.37 U1.39 U1.40 U1.50 U1.53 U2.4 U3.5 USBC1. USBC1.A8 USBC1.B8

## Polygon pours and split planes (outlines as drawn)
PGND on Top Layer "Top Layer-PGND" (solid, remove dead copper, pour order 2): 3.9,5.65 ccw(c6.4,5.65) 6.4,3.15 44.4,3.15 ccw(c44.4,5.65) 46.9,5.65 46.9,32.65 ccw(c44.4,32.65) 44.4,35.15 6.4,35.15 ccw(c6.4,32.65) 3.9,32.65 3.9,32.66
3V3 on Top Layer "Top Layer-3V3" (solid, remove dead copper, pour order 1): 17,19.8 14.6,19.8 14.6,22.7 17,22.7
5V on Top Layer "Top Layer-5V" (solid, remove dead copper, pour order 0): 13.7,18.1 18.9,18.1 18.9,14.4 13.7,14.4
PGND on Bottom Layer "Bottom Layer-PGND" (solid, remove dead copper, pour order 3): 3.9,5.65 ccw(c6.4,5.65) 6.4,3.15 44.4,3.15 ccw(c44.4,5.65) 46.9,5.65 46.9,32.65 ccw(c44.4,32.65) 44.4,35.15 6.4,35.15 ccw(c6.4,32.65) 3.9,32.65 3.9,32.66
3V3 on POWER (split plane): 44.595,34.632 44.789,34.604 44.978,34.556 45.162,34.49 45.339,34.407 45.507,34.306 45.664,34.19 45.808,34.058 45.94,33.914 46.056,33.757 46.157,33.589 46.24,33.412 46.306,33.228 46.354,33.039 46.382,32.845 46.391,32.666 46.39,32.65 46.39,5.65 46.391,5.634 46.382,5.455 46.354,5.261 46.306,5.072 46.24,4.888 46.157,4.711 46.056,4.543 45.94,4.386 45.808,4.242 45.664,4.11 45.507,3.994 45.339,3.893 45.162,3.81 44.978,3.744 44.789,3.696 44.595,3.668 44.416,3.659 44.4,3.66 6.4,3.66 6.384,3.659 6.205,3.668 6.011,3.696 5.822,3.744 5.638,3.81 5.461,3.893 5.293,3.994 5.136,4.11 4.992,4.242 4.86,4.386 4.744,4.543 4.643,4.711 4.56,4.888 4.494,5.072 4.446,5.261 4.418,5.455 4.409,5.634 4.41,5.65 4.41,32.659 4.41,32.66 4.409,32.673 4.418,32.845 4.446,33.039 4.494,33.228 4.56,33.412 4.643,33.589 4.744,33.757 4.86,33.914 4.992,34.058 5.136,34.19 5.293,34.306 5.461,34.407 5.638,34.49 5.822,34.556 6.011,34.604 6.205,34.632 6.384,34.641 6.4,34.64 44.4,34.64 44.416,34.641
5V on POWER (split plane): 44.098,7.402 18,7.402 17.961,7.394 17.928,7.372 17.906,7.339 17.898,7.3 17.898,5.602 9.702,5.602 9.702,18.098 18.898,18.098 18.898,10.3 18.906,10.261 18.928,10.228 18.961,10.206 19,10.198 41.2,10.198 41.239,10.206 41.272,10.228 41.294,10.261 41.302,10.3 41.302,23.498 44.098,23.498
PGND on GND (split plane): 44.595,34.632 44.789,34.604 44.978,34.556 45.162,34.49 45.339,34.407 45.507,34.306 45.664,34.19 45.808,34.058 45.94,33.914 46.056,33.757 46.157,33.589 46.24,33.412 46.306,33.228 46.354,33.039 46.382,32.845 46.391,32.666 46.39,32.65 46.39,5.65 46.391,5.634 46.382,5.455 46.354,5.261 46.306,5.072 46.24,4.888 46.157,4.711 46.056,4.543 45.94,4.386 45.808,4.242 45.664,4.11 45.507,3.994 45.339,3.893 45.162,3.81 44.978,3.744 44.789,3.696 44.595,3.668 44.416,3.659 44.4,3.66 6.4,3.66 6.384,3.659 6.205,3.668 6.011,3.696 5.822,3.744 5.638,3.81 5.461,3.893 5.293,3.994 5.136,4.11 4.992,4.242 4.86,4.386 4.744,4.543 4.643,4.711 4.56,4.888 4.494,5.072 4.446,5.261 4.418,5.455 4.409,5.634 4.41,5.65 4.41,32.659 4.41,32.66 4.409,32.673 4.418,32.845 4.446,33.039 4.494,33.228 4.56,33.412 4.643,33.589 4.744,33.757 4.86,33.914 4.992,34.058 5.136,34.19 5.293,34.306 5.461,34.407 5.638,34.49 5.822,34.556 6.011,34.604 6.205,34.632 6.384,34.641 6.4,34.64 44.4,34.64 44.416,34.641

## Other copper
POWER (plane layer: these items are gaps in the copper):
  lines w0.2: 9.6,5.5 18,5.5 18,7.3 44.2,7.3 44.2,23.6 41.2,23.6 41.2,10.3 19,10.3 19,18.2 9.6,18.2 9.6,5.5

## Silkscreen, mask and mechanical layers (free items; w line width, h text height)
Top Overlay:
  text "CAN" at 8.8,30.01 h1
  text "RST" at 32.59,30.001 h1 r90
  text "BOOT" at 41.79,30.001 h1 r90
  text "L" at 9.95,28.7 h0.6
  text "H" at 9.95,25.9 h0.6
  text "I2C" at 40.785,24.05 h1.5 r90
  text "USB" at 13.501,23.41 h1
  text "SPI" at 40.785,13.85 h1.5 r90
  text "A" at 9.95,11.8 h0.6
  text "MCU" at 23.051,10.76 h1
  text "B" at 9.1,8.7 h0.6
  text "SWD" at 36.19,7.95 h1 r90
  text "485" at 8.351,6.81 h1
  text "USR" at 33.251,5.86 h1
  text "PWR" at 32.951,4.45 h1
Bottom Overlay:
  text "12~48V 10A" at 44.019,30.23 h2 r90
  text "L" at 9.65,30.1 h0.6
  text "FOC" at 41.459,29.467 h5 r90
  text "CAN" at 11.085,28.9 h1.5 r90
  text "H" at 9.65,24.7 h0.6
  text "Ver 1.2" at 39.239,20.629 h2 r90
  text "Module" at 42.314,20.628 h4.5 r90
  text "A" at 9.65,13 h0.6
  text "485" at 11.085,11.749 h1.5 r90
  text "B" at 9.65,7.65 h0.6
Top Solder:
  rectangle: 11.1,16.45 12.25,17.05
Mechanical 1:
  lines w0.2: 3.9,32.65 cw(c6.4,32.65) 6.4,35.15 ; 3.9,32.66 3.9,5.65 ccw(c6.4,5.65) 6.4,3.15 44.4,3.15 ccw(c44.4,5.65) 46.9,5.65 46.9,32.65 ccw(c44.4,32.65) 44.4,35.15 6.41,35.15
Drill Drawing:
  text ".Legend" at 52.5,21.833 h1

## Dimensions
11.12,4.34 to 6.4,3.15 on Mechanical 13
11.12,4.34 to 3.9,5.65 on Mechanical 13
11.12,33.95 to 6.4,35.15 on Mechanical 13
3.9,32.65 to 11.12,33.95 on Mechanical 13
44.4,5.65 to 46.9,5.65 on Mechanical 13
44.4,5.65 to 44.4,3.15 on Mechanical 13
6.4,5.65 to 6.4,3.15 on Mechanical 13
6.4,5.65 to 3.9,5.65 on Mechanical 13
46.9,32.65 to 44.4,32.65 on Mechanical 13
44.4,35.15 to 44.4,32.65 on Mechanical 13
6.41,35.15 to 6.4,32.65 on Mechanical 13
3.9,32.65 to 6.4,32.65 on Mechanical 13
3.9,32.65 to 46.9,32.65 on Mechanical 13
44.4,35.15 to 44.4,3.15 on Mechanical 13

## Text inside footprints (layer, text, board x,y; h text height)
JP3: Top Overlay "3" at 38.75,12.6 h0.8 r90; Top Overlay "G" at 38.75,11.15 h0.8 r90; Top Overlay "D" at 38.75,9.65 h0.8 r90; Top Overlay "C" at 38.75,8.1 h0.8 r90
JP4: Top Overlay "GH" at 4.534,28.479 h1.02 r270; Top Overlay "*" at 8.994,29.523 h0.5 r270
JP5: Bottom Overlay "GH" at 4.534,26.771 h1.02 r270; Bottom Overlay "*" at 8.994,25.727 h0.5 r270
JP6: Top Overlay "GH" at 4.534,11.529 h1.02 r270; Top Overlay "*" at 8.994,12.573 h0.5 r270
JP7: Bottom Overlay "GH" at 4.534,9.821 h1.02 r270; Bottom Overlay "*" at 8.994,8.777 h0.5 r270
JP8: Top Overlay "GH" at 44.448,24.121 h1.02 r90; Top Overlay "*" at 41.906,21.846 h0.5 r90; Top Overlay "1.25" at 45.994,23.275 h1.02 r90
JP9: Top Overlay "GH" at 44.448,13.921 h1.02 r90; Top Overlay "*" at 41.906,10.396 h0.5 r90; Top Overlay "1.25" at 45.994,13.075 h1.02 r90